# EAGLE board kicker2 (EAGLE 4.16)
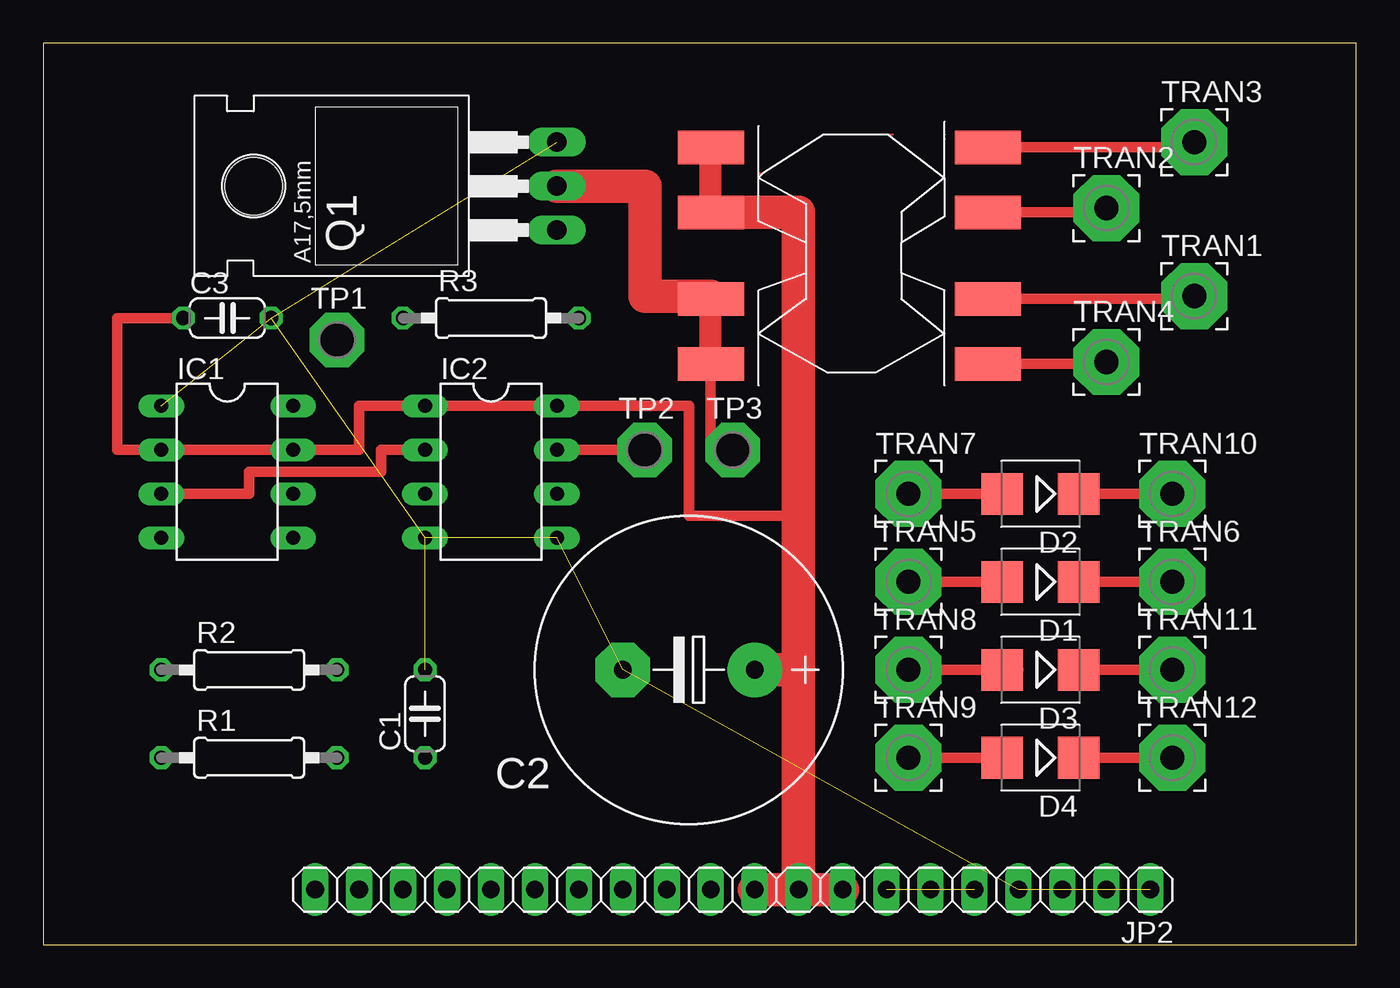
[diagram p0: board, top side]
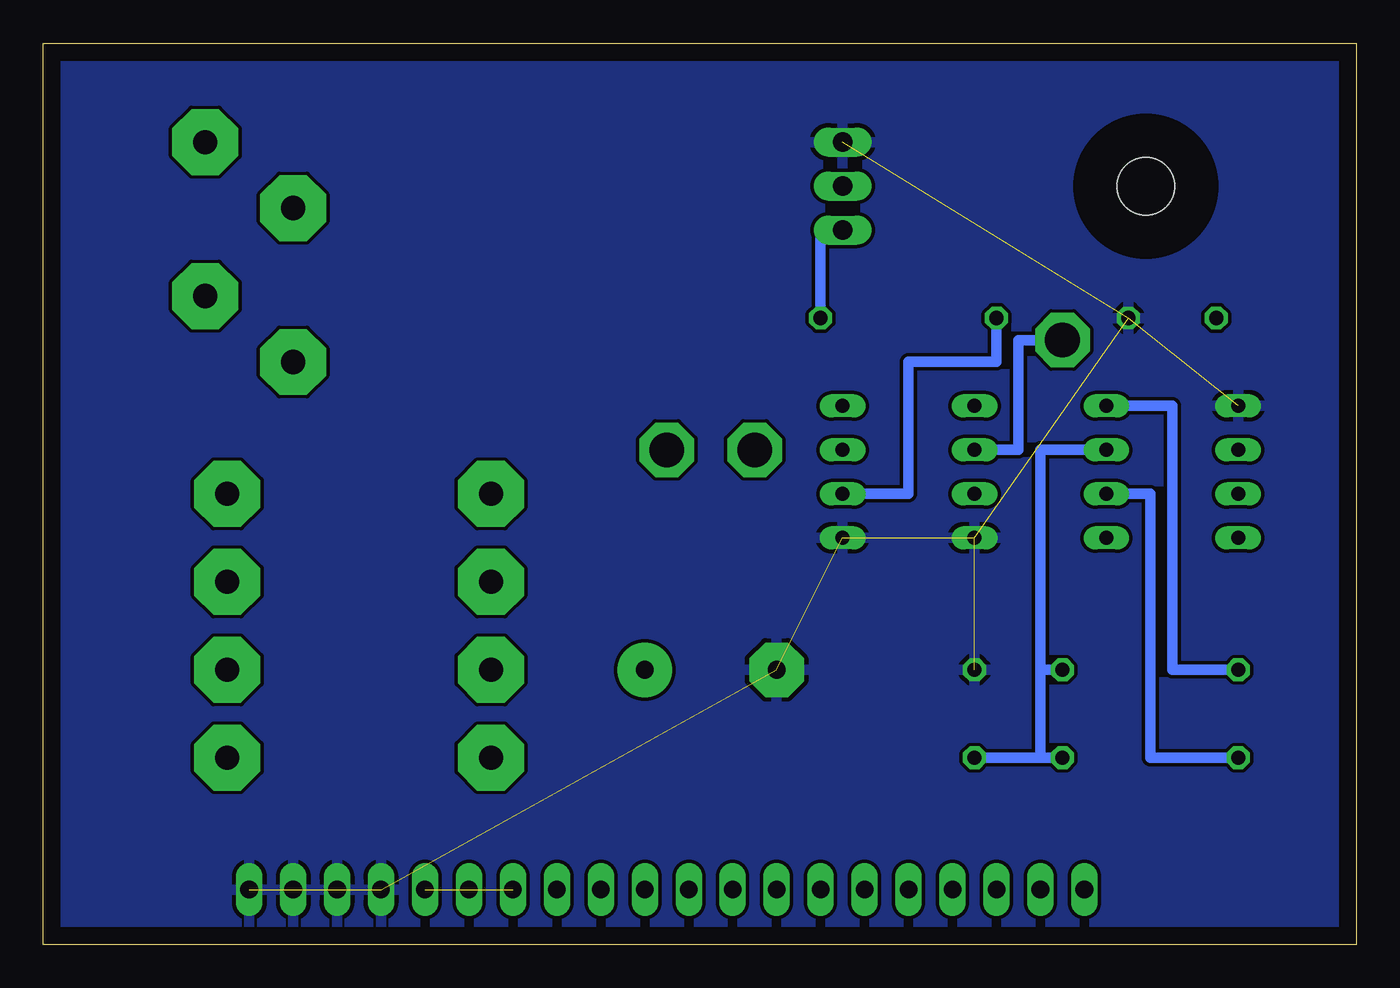
[diagram p1: board, bottom side, seen from below]

Size 75.87 x 52.06 mm. Coordinates in mm from the lower left corner, seen from the top.
Outline: 0,0 75.87,0 75.87,52.06 0,52.06 0,0
Copper layers (1*16): Top 0.035mm / dielectric 1.5mm / Bottom 0.035mm
Design rules "default": minimum track width 10mil, minimum drill 24mil, track to track 8mil, track to pad 8mil, pad to pad 8mil, via to via 8mil, smd to smd 8mil, copper to edge 40mil, drill to drill 8mil, minimum pad ring 10mil, minimum via ring 8mil, stop-mask expansion 4mil, vias tented up to drill 0mil, thermal gap 10mil

## Footprints (pad centres in the part's own frame; a part is rotated, then mirrored left to right if it is on the bottom)
C050-024X044 = drill 0.813 octagon: 1 -2.54,0; 2 2.54,0
E7,5-18 = drill 1.016 pad 3.15 round: + -3.81,0 | drill 1.016 pad 3.15 octagon: - 3.81,0
SMB = smd 2.4 x 2.4: A 2.2,0; C -2.2,0
DIL08 = drill 0.813 long: 1 -3.81,-3.81; 2 -1.27,-3.81; 3 1.27,-3.81; 4 3.81,-3.81; 5 3.81,3.81; 6 1.27,3.81; 7 -1.27,3.81; 8 -3.81,3.81
1X20 = drill 1.016 long: 1 -24.13,0; 2 -21.59,0; 3 -19.05,0; 4 -16.51,0; 5 -13.97,0; 6 -11.43,0; 7 -8.89,0; 8 -6.35,0; 9 -3.81,0; 10 -1.27,0; 11 1.27,0; 12 3.81,0; 13 6.35,0; 14 8.89,0; 15 11.43,0; 16 13.97,0; 17 16.51,0; 18 19.05,0; 19 21.59,0; 20 24.13,0
TO220 = drill 1.118 long: 1 -2.54,-6.35; 2 0,-6.35; 3 2.54,-6.35 | hole 3.302: 0,11.176
0207/10 = drill 0.813 octagon: 1 -5.08,0; 2 5.08,0
P1-20 = drill 2.007 pad 3.15 octagon: 1 0,0
3,81/1,4 = drill 1.397 pad 3.81 octagon: 1 0,0
SM = smd 3.81 x 1.93: 1 0.5,-3.5; 2 0.5,0.25; 3 0.5,5.25; 4 0.5,9; 5 16.5,9; 6 16.5,5.25; 7 16.5,0.25; 8 16.5,-3.5

## Placement (x,y rotation side)
C1  2000pFr  [C050-024X044]  22.06,13.33 90 top
C2  [E7,5-18]  37.3,15.87 180 top
C3  2000pFr  [C050-024X044]  10.63,36.19 0 top
D1  ES2D  [SMB]  57.62,20.95 180 top
D2  ES2D  [SMB]  57.62,26.03 180 top
D3  ES2D  [SMB]  57.62,15.87 180 top
D4  ES2D  [SMB]  57.62,10.79 180 top
IC1  LM555N  [DIL08]  10.63,27.3 270 top
IC2  MIC4420N  [DIL08]  25.87,27.3 270 top
JP2  [1X20]  39.84,3.17 180 top
Q1  SUP75N06-08  [TO220]  23.33,43.81 90 top
R1  2.2K  [0207/10]  11.9,10.79 0 top
R2  100  [0207/10]  11.9,15.87 0 top
R3  10  [0207/10]  25.87,36.19 0 top
TP1  TPSPAD1-20  [P1-20]  16.98,34.92 0 top
TP2  TPSPAD1-20  [P1-20]  34.76,28.57 0 top
TP3  TPSPAD1-20  [P1-20]  39.84,28.57 0 top
TRAN1  TRAN1  [3,81/1,4]  66.51,37.46 0 top
TRAN2  TRAN1  [3,81/1,4]  61.43,42.54 0 top
TRAN3  TRAN1  [3,81/1,4]  66.51,46.35 0 top
TRAN4  TRAN1  [3,81/1,4]  61.43,33.65 0 top
TRAN5  TRAN1  [3,81/1,4]  50,20.95 0 top
TRAN6  TRAN1  [3,81/1,4]  65.24,20.95 0 top
TRAN7  TRAN1  [3,81/1,4]  50,26.03 0 top
TRAN8  TRAN1  [3,81/1,4]  50,15.87 0 top
TRAN9  TRAN1  [3,81/1,4]  50,10.79 0 top
TRAN10  TRAN1  [3,81/1,4]  65.24,26.03 0 top
TRAN11  TRAN1  [3,81/1,4]  65.24,15.87 0 top
TRAN12  TRAN1  [3,81/1,4]  65.24,10.79 0 top
U$1  A0009-AL  [SM]  55.08,42.54 180 top

## Library data of the parts
C1-C3 R1-R3 = rcl
D1-D4 = diode
IC1 = linear
IC2 = transistor-power
JP2 = pinhead
Q1 = transistor-fet
TP1-TP3 = testpad
TRAN1-TRAN12 = wirepad
U$1 = Kicker

## Nets
+5V: JP2.5 JP2.6 JP2.7
+12V: C1.1 C2.+ C3.1 IC1.2 IC1.7 IC2.1 IC2.8 JP2.8 JP2.9 JP2.10 R1.2 R2.2 U$1.7 U$1.8
N$1: Q1.1 R3.2
N$2: TRAN1.1 U$1.3
N$3: IC1.6 R1.1
N$4: IC2.6 R3.1
N$5: Q1.2 TP3.1 U$1.5 U$1.6
N$6: TRAN2.1 U$1.2
N$7: TRAN3.1 U$1.1
N$8: TRAN4.1 U$1.4
N$9: D1.A TRAN5.1
N$10: D2.A TRAN7.1
N$11: D3.A TRAN8.1
N$12: D4.A TRAN9.1
N$13: IC1.3 IC2.2 TP1.1
N$14: D1.C TRAN6.1
N$15: IC2.7 TP2.1
N$16: D2.C TRAN10.1
N$17: D3.C TRAN11.1
N$18: IC1.8 R2.1
N$19: D4.C TRAN12.1
PE: C1.2 C2.- C3.2 IC1.1 IC2.4 IC2.5 JP2.1 JP2.2 JP2.3 JP2.4 Q1.3

## Tracks (layer width: path | path; a pad name or v marks a point on that pad's centre or on a via)
+5V  (2 unrouted)
+12V
  Top 0.61: 43.65,24.76 37.3,24.76 37.3,31.11 IC2.8 IC2.1 18.25,31.11 18.25,28.57 IC1.7 IC1.2 4.28,28.57 4.28,36.19 C3.1
  Top 1.27: U$1.7 U$1.8 | JP2.9 JP2.10
  Top 1.93: U$1.7 43.65,42.29 43.65,24.76 43.65,15.87 | 43.65,15.87 JP2.9 | JP2.9 JP2.10 | JP2.9 JP2.8 | 43.65,15.87 C2.+
  Bottom 0.61: IC1.7 18.25,28.57 18.25,15.87 | 18.25,15.87 R2.2 | R1.2 18.25,10.79 | 18.25,10.79 18.25,15.87 | 18.25,10.79 C1.1
N$1
  Bottom 0.61: R3.2 30.95,41.27 Q1.1
N$2
  Top 0.61: U$1.3 66.51,37.29 TRAN1.1
N$3
  Bottom 0.61: R1.1 11.9,10.79 11.9,26.03 IC1.6
N$4
  Bottom 0.61: R3.1 20.79,33.65 25.87,33.65 25.87,26.03 IC2.6
N$5
  Top 0.61: TP3.1 38.57,28.57 38.57,33.65
  Top 1.27: U$1.6 38.57,37.46 | U$1.6 | U$1.6 38.57,33.65 U$1.5
  Top 1.93: Q1.2 34.76,43.81 34.76,37.46 38.57,37.46
N$6
  Top 0.61: U$1.2 61.43,42.29 TRAN2.1
N$7
  Top 0.61: U$1.1 66.51,46.04 TRAN3.1
N$8
  Top 0.61: U$1.4 61.43,33.54 TRAN4.1
N$9
  Top 0.61: TRAN5.1 D1.A
N$10
  Top 0.61: TRAN7.1 D2.A
N$11
  Top 0.61: TRAN8.1 55.08,15.87 | D3.A 56.35,15.87 | 55.08,15.87 D3.A | D3.A 55.08,15.87
N$12
  Top 0.61: TRAN9.1 D4.A
N$13
  Top 0.61: IC1.3 11.9,26.03 11.9,27.3 19.52,27.3 19.52,28.57 IC2.2
  Bottom 0.61: IC2.2 19.52,28.57 19.52,34.92 TP1.1
N$14
  Top 0.61: D1.C TRAN6.1
N$15
  Top 0.61: IC2.7 TP2.1
N$16
  Top 0.61: TRAN10.1 D2.C
N$17
  Top 0.61: TRAN11.1 D3.C
N$18
  Bottom 0.61: R2.1 10.63,15.87 10.63,31.11 IC1.8
N$19
  Top 0.61: D4.C TRAN12.1
PE  (10 unrouted)
  pour Bottom: -3.34,-1.91 77.94,-1.91 77.94,55.24 -3.34,55.24